# Altium PCB wtc.PcbDoc
Units mm, origin at the board's own origin, x right, y up, seen from the top; angles counter-clockwise.
Board outline 131 x 99 mm, 2 copper layers (Top Layer, Bottom Layer); 42 components, 24 nets, 205 pads, 3 vias.
Unrouted connection lines stored in the file: 86.
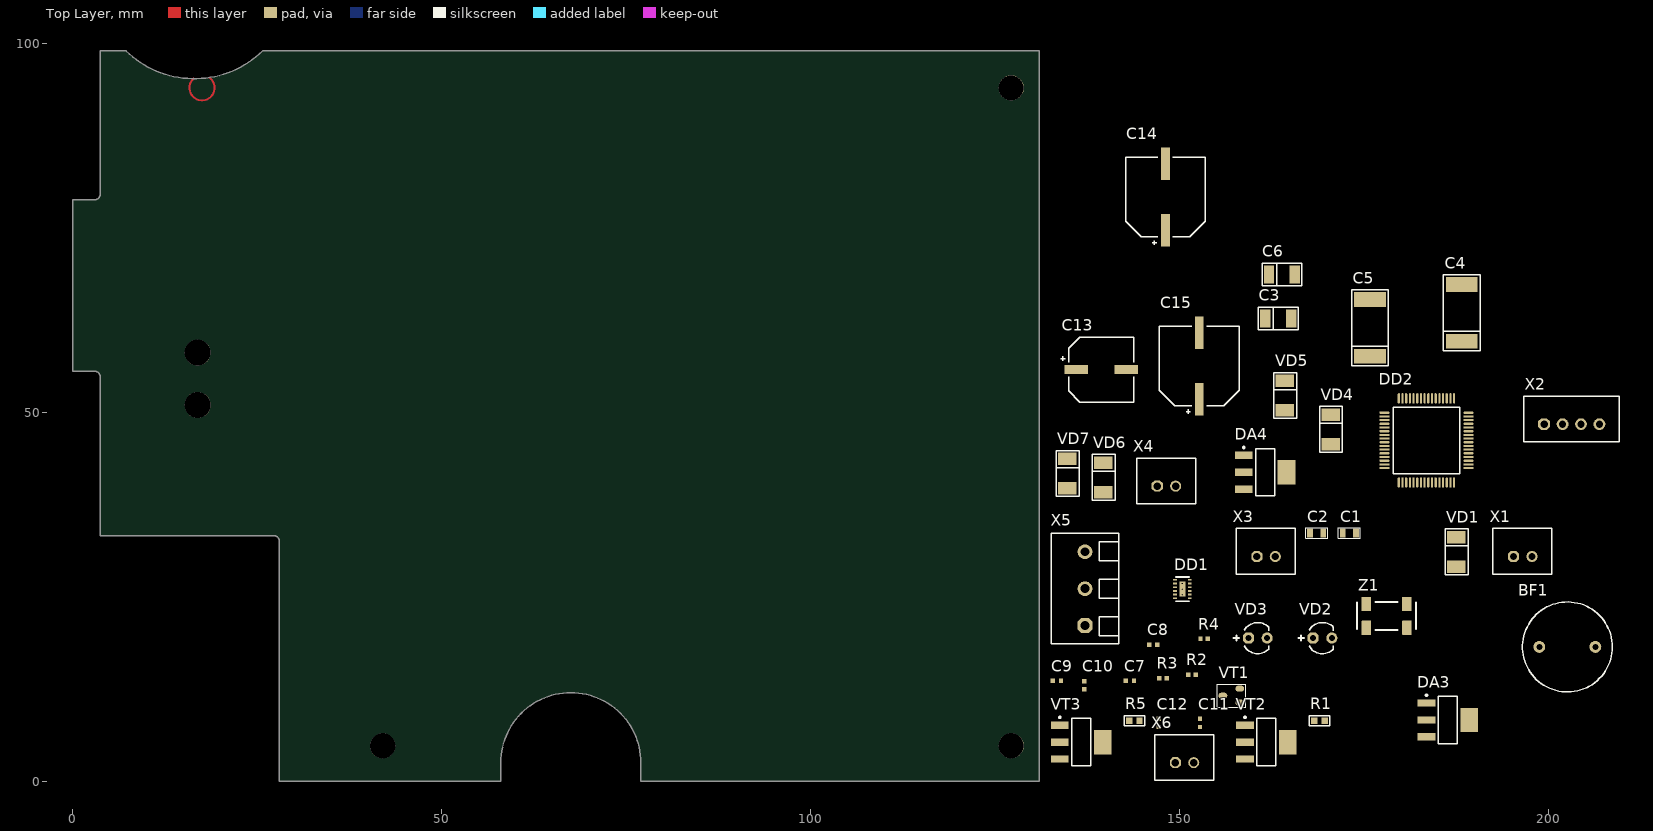
[diagram p0: Top Layer view]
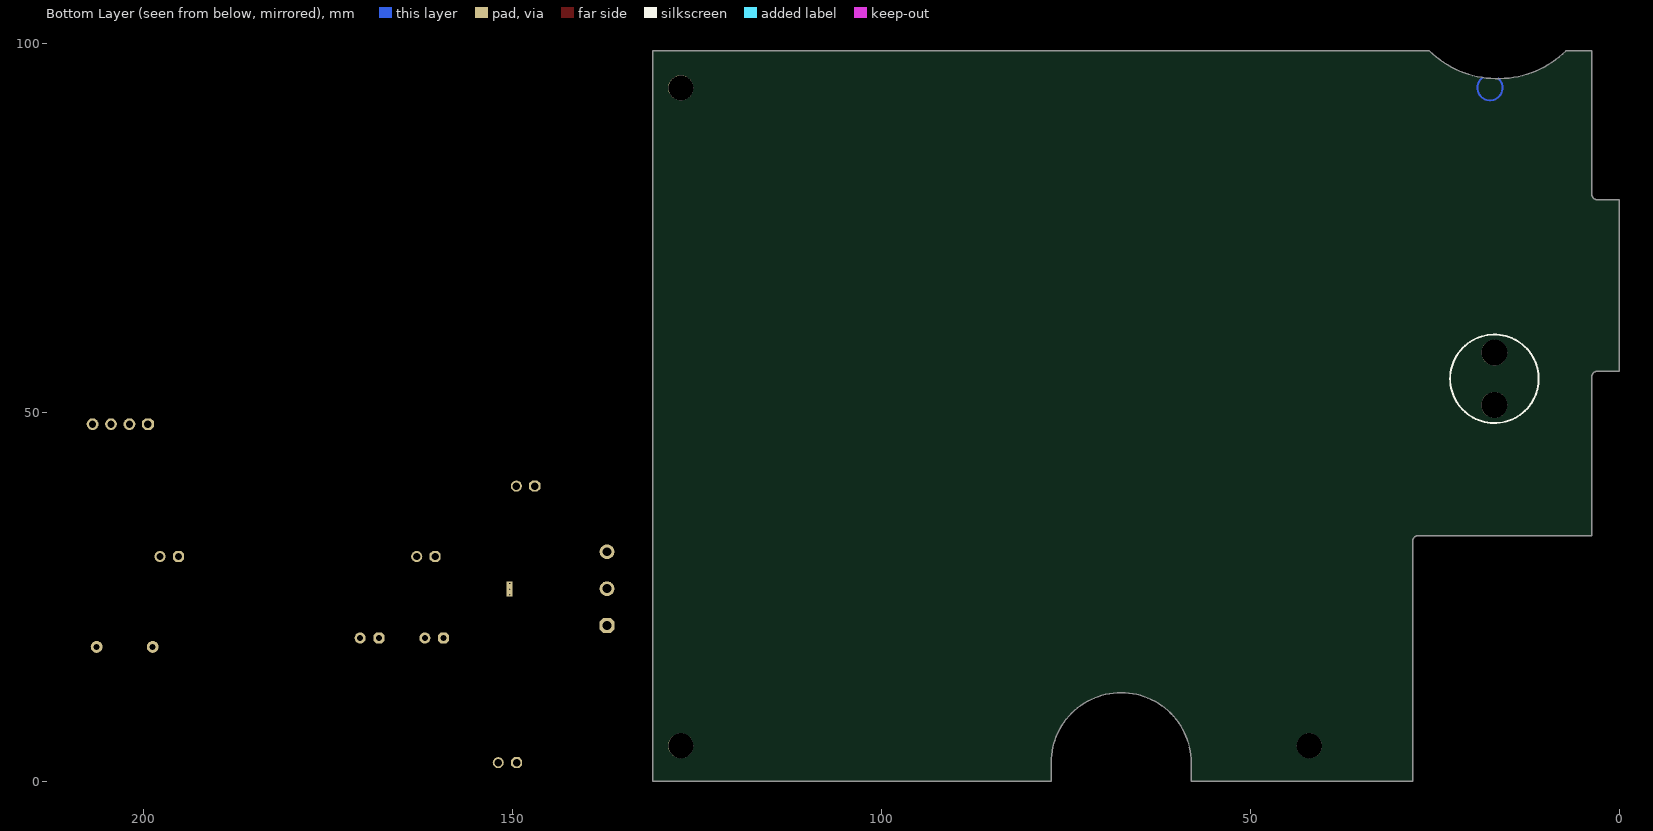
[diagram p1: Bottom Layer view, seen from below]

## Layer stack, top to bottom
Top Solder: solder mask 0.0102, Solder Resist, Dk 3.5
Top Layer: signal copper 0.0356
Dielectric 1: dielectric 0.32, FR-4, Dk 4.8
Bottom Layer: signal copper 0.0356
Bottom Solder: solder mask 0.0102, Solder Resist, Dk 3.5

## Board outline
7.2,99 ccw(c16.457,108.485) 25.714,99 25.725,99 131,99 131,0 77,0 77,2.5 ccw(c67.5,2.5) 67.5,12 ccw(c67.5,2.5) 58,2.5 58,0 28,0 28,32.5 ccw(c27.2,32.5) 27.2,33.3 3.7,33.3 3.7,54.8 ccw(c2.9,54.8) 2.9,55.6 0,55.6 0,78.8 2.9,78.8 ccw(c2.9,79.6) 3.7,79.6 3.7,99

## Design rules (kind name [scope] priority, off if disabled: settings)
Clearance [All] p1: gap=0.254 ignorepadtopadclearanceinfootprint=FALSE except(0: Arc-Hole Track-Hole SMDPad-Hole THPad-Hole Via-Hole Fill-Hole Poly-Hole Region-Hole Text-Hole)
PolygonConnect [All] p1: connectstyle=Relief reliefconductorwidth=0.254 reliefentries=4 polygonreliefangle="90 Angle" airgapwidth=0.254
RoutingVias [All] p1: holewidth=0.711 width=1.27 viastyle="Through Hole" minholewidth=0.711 minwidth=1.27 maxholewidth=0.711 maxwidth=1.27
SolderMaskExpansion [All] p1: expansion=0.102 istentingtop=FALSE
Width [All] p1: maxlimit=0.254 minlimit=0.254 preferedwidth=0.254
30 further rules are at their usual default settings.

## Classes and differential pairs
component class wtc_sh3: C14 C15 VD4 VD5 VD6 VD7 X1 X2 X3 X4 X6
component class wtc_sh2: C1 C2 C3 C4 C5 C6 C11 C12 C13 DA3 DA4 DD1 DD? R1 R5 VD1 VT2 VT3 X5
component class wtc: BF1 C7 C8 C9 C10 DD2 R2 R3 R4 VD2 VD3 VT1 Z1

## Components (designator, comment, footprint, x,y, rotation, side; value= is the part's Value field where it differs from the comment)
BF1 "AI-1223-TWT-3V-2-R" "BUZ: AI-1223-TWT-3V-2-R" 202.6,18.2 r0 top
C1 "0,1uF" C_0603 173.055,33.632 r0 top
C2 "0,1uF" C_0603 168.61,33.632 r0 top
C3 "10uF" TANTAL_B 163.406,62.731 r0 top
C4 "100uF" TANTAL_D 188.295,63.477 r90 top
C5 "22uF" TANTAL_D 175.849,61.445 r90 top
C6 "10uF" TANTAL_B 163.911,68.684 r0 top
C7 "22pF" CH0402C 143.3,13.6 r0 top
C8 "22pF" CH0402C 146.45,18.5 r0 top
C9 "400nF" CH0402C 133.4,13.6 r0 top
C10 "4,7uF" CH0402C 137.1,13 r90 top
C11 "*" CH0402C 152.8,7.9 r90 top
C12 "*" CH0402C 147.2,7.9 r90 top
C13 "470uF 10V" D8C3.2H12 139.4,55.8 r0 top
C14 "470uF 25V" D10C4.4H10 148.1,79.2 r90 top
C15 "470uF 25V" D10C4.4H10 152.7,56.3 r90 top
DA3 "LM1117-5V_FIX" SOT223_123 186.4,8.3 r0 top
DA4 "LM1117-3,3V_FIX" SOT223_123 161.625,41.887 r0 top
DD1 "DRV8835" WSON12 150.4,24.8 r0 top
DD2 "STM32F103RCT6" 64-LQFP 183.5,46.2 r0 top
R1 "19,2k" CH0603R 169,8.2 r0 top
R2 "10k" CH0402R 151.719,14.455 r0 top
R3 "100" CH0402R 147.774,13.947 r0 top
R4 "100" CH0402R 153.37,19.281 r0 top
R5 "19,2k" CH0603R 143.9,8.2 r0 top
VD1 "S2MA" SMA 187.533,31.092 r90 top
VD2 "=value" IK_LED_3MM 169.372,19.408 r0 top
VD3 "=value" PHOTO_LED_3MM 160.609,19.408 r0 top
VD4 "*" SMA 170.5,47.7 r90 top
VD5 "*" SMA 164.3,52.3 r90 top
VD6 "*" SMA 139.7,41.2 r90 top
VD7 "*" SMA 134.8,41.7 r90 top
VT1 "VT_SOT23" SOT23 156.021,12.55 r0 top
VT2 "*" SOT223_123 161.8,5.3 r0 top
VT3 "*" SOT223_123 136.7,5.3 r0 top
X1 "*" "CON: CWF-2" 196.55,30.457 r0 top
X2 "*" "CON: CWF-4" 203.2,48.4 r0 top
X3 "*" "CON: CWF-2" 161.752,30.457 r0 top
X4 "*" "CON: CWF-2" 148.25,40 r0 top
X5 "*" "CON: 300-03P-5.0" 137.2,26.1 r90 top
X6 "*" "CON: CWF-2" 150.7,2.513 r0 top
Z1 "qurtz" "SMD 32.768KHZ" 178.1,22.4 r0 top

## Footprints (in the part's own frame and the unit in brackets; to place one, negate y for a bottom-side part, rotate by r counter-clockwise, add the part's x,y. Pads: shape width x height; smd on the part's side, far side on the other; paste and mask are expansions set on the pad)
64-LQFP [mm] "Thin QFP, 64-Leads, Body 10x10mm, Pitch 0.5mm, IPC Medium Density"
  oval 1.4x0.3 smd: 1(-5.7,3.75) 2(-5.7,3.25) 3(-5.7,2.75) 4(-5.7,2.25) 5(-5.7,1.75) 6(-5.7,1.25) 7(-5.7,0.75) 8(-5.7,0.25) 9(-5.7,-0.25) 10(-5.7,-0.75) 11(-5.7,-1.25) 12(-5.7,-1.75) 13(-5.7,-2.25) 14(-5.7,-2.75) 15(-5.7,-3.25) 16(-5.7,-3.75) 33(5.7,-3.75) 34(5.7,-3.25) 35(5.7,-2.75) 36(5.7,-2.25) 37(5.7,-1.75) 38(5.7,-1.25) 39(5.7,-0.75) 40(5.7,-0.25) 41(5.7,0.25) 42(5.7,0.75) 43(5.7,1.25) 44(5.7,1.75) 45(5.7,2.25) 46(5.7,2.75) 47(5.7,3.25) 48(5.7,3.75)
  round 0.5 on Mech1: 1(-5.4,5.4)
  oval 0.3x1.4 smd: 17(-3.75,-5.7) 18(-3.25,-5.7) 19(-2.75,-5.7) 20(-2.25,-5.7) 21(-1.75,-5.7) 22(-1.25,-5.7) 23(-0.75,-5.7) 24(-0.25,-5.7) 25(0.25,-5.7) 26(0.75,-5.7) 27(1.25,-5.7) 28(1.75,-5.7) 29(2.25,-5.7) 30(2.75,-5.7) 31(3.25,-5.7) 32(3.75,-5.7) 49(3.75,5.7) 50(3.25,5.7) 51(2.75,5.7) 52(2.25,5.7) 53(1.75,5.7) 54(1.25,5.7) 55(0.75,5.7) 56(0.25,5.7) 57(-0.25,5.7) 58(-0.75,5.7) 59(-1.25,5.7) 60(-1.75,5.7) 61(-2.25,5.7) 62(-2.75,5.7) 63(-3.25,5.7) 64(-3.75,5.7)
  round 0.5 on Top Overlay: ""(-5.7,4.4)
  silkscreen extent -4.5,-4.5 4.5,4.5, body extent -6,-6 6,6, height 1.5
"BUZ: AI-1223-TWT-3V-2-R" [mm]
  round 1.6 hole 0.8: 1(-3.8,0) 2(3.8,0)
  round 0.5 on Top Overlay: ""(-6.7,0)
  round 0.5 on Mech1: ""(-5.4,0)
  silkscreen extent -6.1,-6.1 6.1,6.1, body extent -6,-6 6,6, height 7.55
C_0603 [mm]
  rect 0.8x1.2 smd: 1(-0.9,0) 2(0.9,0)
  silkscreen extent -1.5,-0.7 1.5,0.7, body extent -0.8,-0.4 0.8,0.4, height 0.6
CH0402C [mm]
  rect 0.6x0.6 smd: 1(-0.55,0) 2(0.55,0)
  body extent -0.51,-0.25 0.51,0.25, height 0.51
CH0402R [mm]
  rect 0.6x0.6 smd: 1(-0.5,0) 2(0.5,0)
  body extent -0.52,-0.25 0.47,0.25, height 0.34
CH0603R [mm]
  rect 0.85x0.85 smd: 1(-0.7,0) 2(0.7,0)
  silkscreen extent -1.4,-0.7 1.4,0.7, body extent -0.8,-0.4 0.8,0.4, height 0.44
"CON: 300-03P-5.0" [mm] "3 pin 5.08mm screw connector"
  oct 2x2 hole 1.2: 1(-5,0)
  round 2 hole 1.2: 2(0,0) 3(5,0)
  round 0.5 on Mech1: 11(-6.7,-3.7)
  silkscreen extent -7.5,-4.57 7.5,4.57, body extent -7.62,-4.44 7.62,4.56, height 12.5
"CON: CWF-2" [mm]
  oct 1.5x1.5 hole 1: 1(-1.25,0)
  round 1.5 hole 1: 2(1.25,0)
  round 0.5 on Mech1: 23(-3.2,-1.7)
  round 0.5 on Top Overlay: 24(-4.5,-2.1)
  silkscreen extent -4.04,-2.41 3.96,3.81, body extent -3.75,-2.18 3.75,3.57, height 7
"CON: CWF-4" [mm]
  oct 1.6x1.6 hole 1: 1(-3.75,0)
  round 1.6 hole 1: 2(-1.25,0) 3(1.25,0) 4(3.75,0)
  round 0.5 on Mech1: ""(-5.9,-1.8)
  silkscreen extent -6.54,-2.41 6.41,3.81, body extent -6.27,-2.19 6.13,3.56, height 7
D8C3.2H12 [mm]
  rect 3.2x1.2 smd: 1(-3.4,0) 2(3.4,0)
  round 0.5 on Mech1: ""(-4.3,-3.7)
  silkscreen extent -5.5,-4.4 4.4,4.4, body extent -4.85,-4.25 4.85,4.25, height 10.5
D10C4.4H10 [mm]
  rect 4.4x1.2 smd: 1(-4.5,0) 2(4.5,0)
  silkscreen extent -6.5,-5.4 5.4,5.4, body extent -5.9,-5.25 5.9,5.25, height 10.5
IK_LED_3MM [mm]
  oct 1.5x1.5 hole 0.8: 1(-1.245,0)
  round 1.5 hole 0.8: 2(1.295,0)
  silkscreen extent -3.25,-2.13 1.51,2.1, body extent -1.93,-1.95 1.64,1.95, height 5.3
PHOTO_LED_3MM [mm]
  oct 1.5x1.5 hole 0.8: 1(-1.245,0)
  round 1.5 hole 0.8: 2(1.295,0)
  silkscreen extent -3.25,-2.13 1.51,2.1, body extent -1.93,-1.95 1.64,1.95, height 6.4
SMA [mm]
  rect 1.7x2.5 smd: 1(-2,0) 2(2,0)
  round 0.5 on Mech1: ""(2,0.9)
  silkscreen extent -3.1,-1.6 3.1,1.5, body extent -2.5,-1.35 2.5,1.35, height 2.28
"SMD 32.768KHZ" [mm]
  rrect5% 1.3x1.9 smd: 1(-2.75,-1.6) 2(-2.75,1.6) 3(2.75,-1.6) 3(2.75,1.6)
  silkscreen extent -4,-1.9 4,1.9, body extent -4,-1.9 4,1.9, height 2.5
SOT23 [mm]
  oval 1.2x0.8 smd: 1(2.175,-1.9) 2(-0.125,-0.95) 3(2.175,0)
  silkscreen extent -0.87,-2.5 3,0.61, body extent -0.3,-2.4 2.5,0.5, height 1.3
SOT223_123 [mm]
  rect 2.4x1 smd: 1(-2.9,2.3) 2(-2.9,-2.3) 3(-2.9,0)
  rect 2.4x3.3 smd: 3(2.9,0)
  round 0.5 on Mech1: ""(-3,2.7)
  silkscreen extent -3.02,-3.2 1.3,3.47, body extent -3.48,-3.25 3.48,3.25, height 1.65
TANTAL_B [mm]
  rect 1.4x2.4 smd: 1(-1.75,0) 2(1.75,0)
  round 0.5 on Mech1: ""(-1.4,1)
  silkscreen extent -2.7,-1.5 2.7,1.5, body extent -1.85,-1.46 1.85,1.47, height 2.03
TANTAL_D [mm]
  rect 2x4.3 smd: 1(-3.85,0) 2(3.85,0)
  round 0.5 on Mech1: ""(-3.1,1.8)
  silkscreen extent -5.15,-2.5 5.15,2.5, body extent -3.7,-2.22 3.7,2.23, height 3.01
WSON12 [mm]
  rrect10% 0.5x0.25 smd: 1(-1,2.5) 2(-1,2) 3(-1,1.5) 4(-1,1) 5(-1,0.5) 6(-1,0) 7(1,0) 8(1,0.5) 9(1,1) 10(1,1.5) 11(1,2) 12(1,2.5)
  rrect1% 0.8x2 smd: 13(0,1.25)
  rrect1% 0.8x2 smd far side: 13(0,1.25)
  silkscreen extent -0.9,-0.4 0.9,2.9, body extent -1.05,-0.31 1.05,2.81, height 0.88

## Part data
BF1: library part Buzzer, Manufacturer="PUI Audio, Inc.", ComponentKind="Internally Driven", HelpURL=https://www.digikey.com/product-detail/en/pui-audio-inc/AI-1223-TWT-3V-2-R/668-1456-ND/5011391, Model=AI-1223-TWT-3V-2-R
C1 C2: library part C_SMD
C3 C4 C5 C6: library part TantalCap
C7 C8 C9 C10 C11 C12: library part Capacitor
C13 C14 C15: library part AlumCap
DA3 DA4: library part LM1117
DD1: "Driver"
DD2: "Cortex-M3"
R1 R2 R3 R4 R5: library part Resistor
VD1 VD4 VD5 VD6 VD7: library part Diod
VD2: library part "IKdiode BL-L314 3mm"
VD3: library part "Photodiode SFH 229 3mm"
VT2 VT3: library part N-chanel, "Mosfet"
X1 X3 X4 X6: library part 2-Connector
X2: library part 4-Connector
X5: library part 3-Connector
Z1: library part Kvarc_32,768

## Free pads (board coordinates)
  round 3.4 hole 3.4: 6(42,4.8) 6(127.2,4.8) 6(127.2,94)
  round 3.5 hole 3.5: board(16.9,51) board(16.9,58.1)

## Via types
v1: diameter 0.3, hole 0.2, Top Layer to Bottom Layer, 3 vias

## Nets (pads, with @x,y where several pads share a name; then routed paths per layer and width w, separated by ;. In a path a pad name is that pad's centre, name@x,y a point inside that pad or via, vN(x,y) a via of type N, cw(c..) or ccw(c..) an arc to the next point about the centre after c; other vN are vias at no path point)
GND: C1.1 C2.1 C3.2 C4.2 C5.2 C6.2 C7.1 C8.2 C9.2 C10.1 C13.2 C14.2 C15.2 DA3.1 DA4.1 DD1.6 DD1.13 DD2.18 DD2.31 DD2.47 DD2.63 R1.1 R5.1 VD2.1 VD4.1 VD6.1 VT1.3 VT2.2 VT3.2 X6.2
  other v1: 150.4,25.296 150.4,26.05 150.4,26.8
NetC1_2: C1.2 C4.1 C6.1 DA3.3 DA4.2 DD1.12 R2.2 R3.2 R4.2
NetC2_2: C2.2 DD1.1 VD1.2
NetC3_1: C3.1 C14.1 C15.1 DA3.2 VD1.1 VD5.2 VD7.2 X6.1
NetC5_1: C5.1 C9.1 C10.2 DA4.3 DD2.19 DD2.32 DD2.48 DD2.64
NetC7_2: C7.2 DD2.4 Z1.1
NetC8_1: C8.1 DD2.3 Z1.2
NetC11_1: C11.1 C12.2 X5.2
NetC11_2: C11.2 VT2.3 X5.1
NetC12_1: C12.1 VT3.3 X5.3
NetC13_1: C13.1 DD2.13
NetDD1_2: DD1.2 DD1.4 X1.1
NetDD1_3: DD1.3 DD1.5 X1.2
NetDD1_7: DD1.7 DD1.9
NetDD1_8: DD1.8 DD1.10
NetDD1_11: DD1.11
NetDD2_22: DD2.22 R1.2 VT2.1
NetDD2_23: DD2.23 R5.2 VT3.1
NetR2_1: R2.1 VD3.2
NetR3_1: R3.1 VD2.2
NetR4_1: R4.1 VT1.2
NetVD3_1: VD3.1 VT1.1
NetVD4_2: VD4.2 VD5.1 X2.1
NetVD6_2: VD6.2 VD7.1 X2.4
pads on no net: BF1. BF1.1 BF1.2 C3. C4. C5. C6. C13. DA3. DA4. DD2. DD2.1 DD2.2 DD2.5 DD2.6 DD2.7 DD2.8 DD2.9 DD2.10 DD2.11 DD2.12 DD2.14 DD2.15 DD2.16 DD2.17 DD2.20 DD2.21 DD2.24 DD2.25 DD2.26 DD2.27 DD2.28 DD2.29 DD2.30 DD2.33 DD2.34 DD2.35 DD2.36 DD2.37 DD2.38 DD2.39 DD2.40 DD2.41 DD2.42 DD2.43 DD2.44 DD2.45 DD2.46 DD2.49 DD2.50 DD2.51 DD2.52 DD2.53 DD2.54 DD2.55 DD2.56 DD2.57 DD2.58 DD2.59 DD2.60 DD2.61 DD2.62 VD1. VD4. VD5. VD6. VD7. VT2. VT3. X1.23 X1.24 X2. X2.2 X2.3 X3.1 X3.2 X3.23 X3.24 X4.1 X4.2 X4.23 X4.24 X5.11 X6.23 X6.24 Z1.3

## Other copper
Multi-Layer:
  lines w0.254: 16.347,95.249 ccw(c17.5,94) 18.488,95.383

## Silkscreen, mask and mechanical layers (free items; w line width, h text height)
Bottom Overlay:
  circle w0.254: c16.9,54.55 r6